# Altium PCB Pillpal.PcbDoc
Units mm, origin at the board's own origin, x right, y up, seen from the top; angles counter-clockwise.
Board outline 47 x 62.5 mm, 2 copper layers (Top Layer, Bottom Layer); 28 components, 27 nets, 127 pads, 43 vias.
Unrouted connection lines stored in the file: 17.
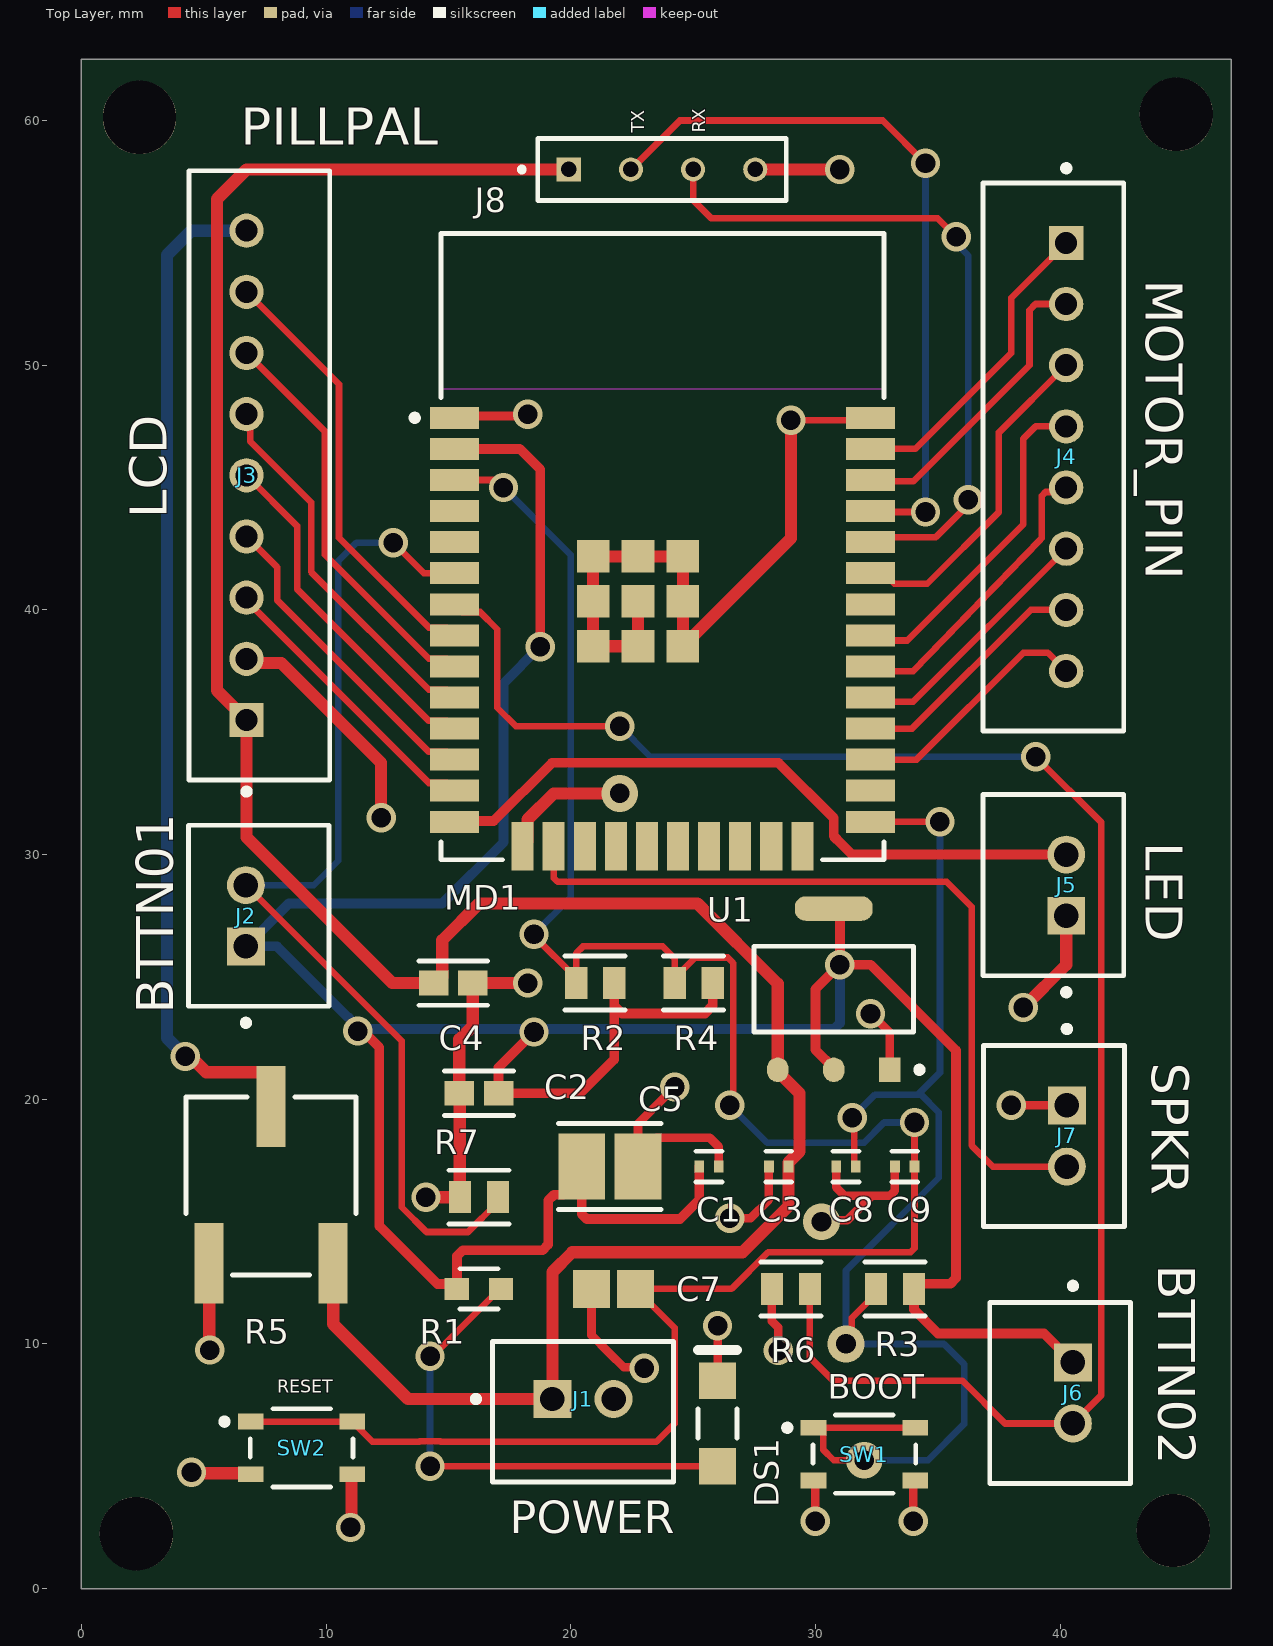
[diagram p0: Top Layer view]
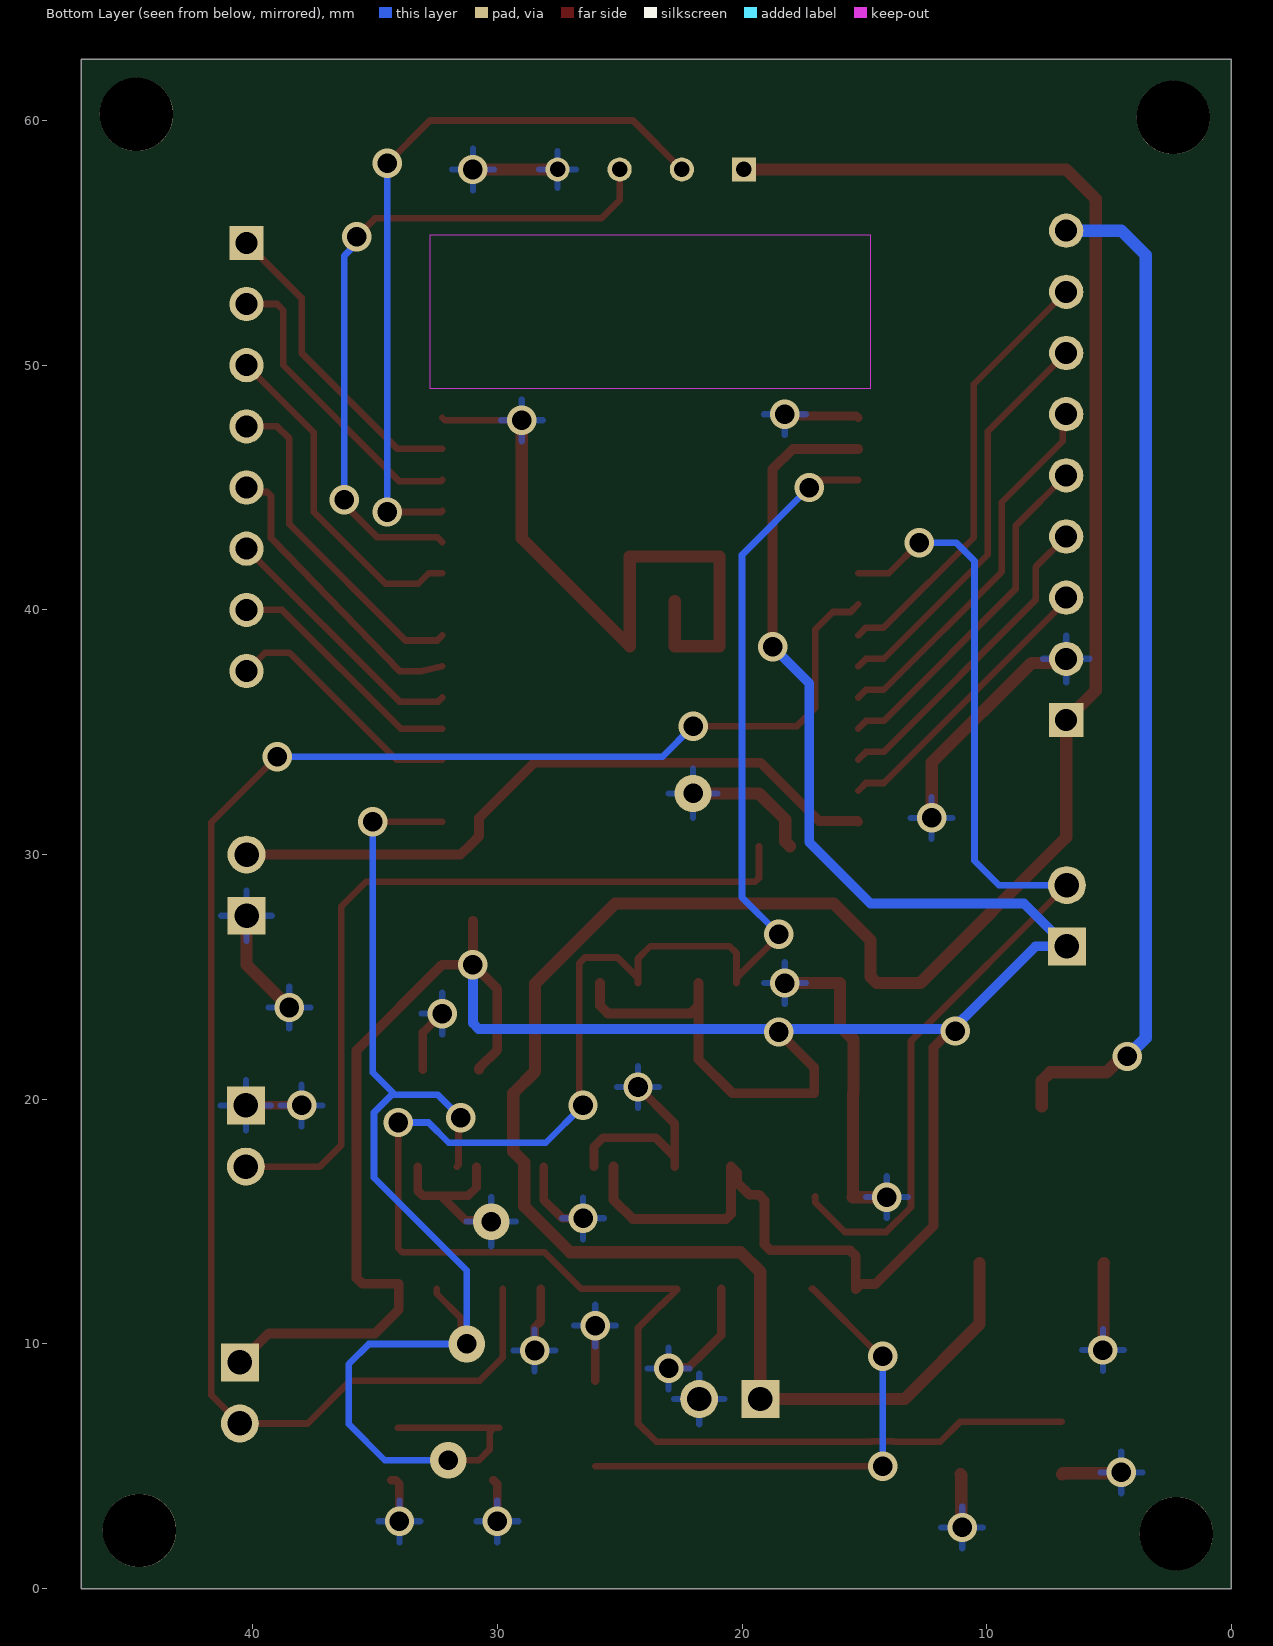
[diagram p1: Bottom Layer view, seen from below]
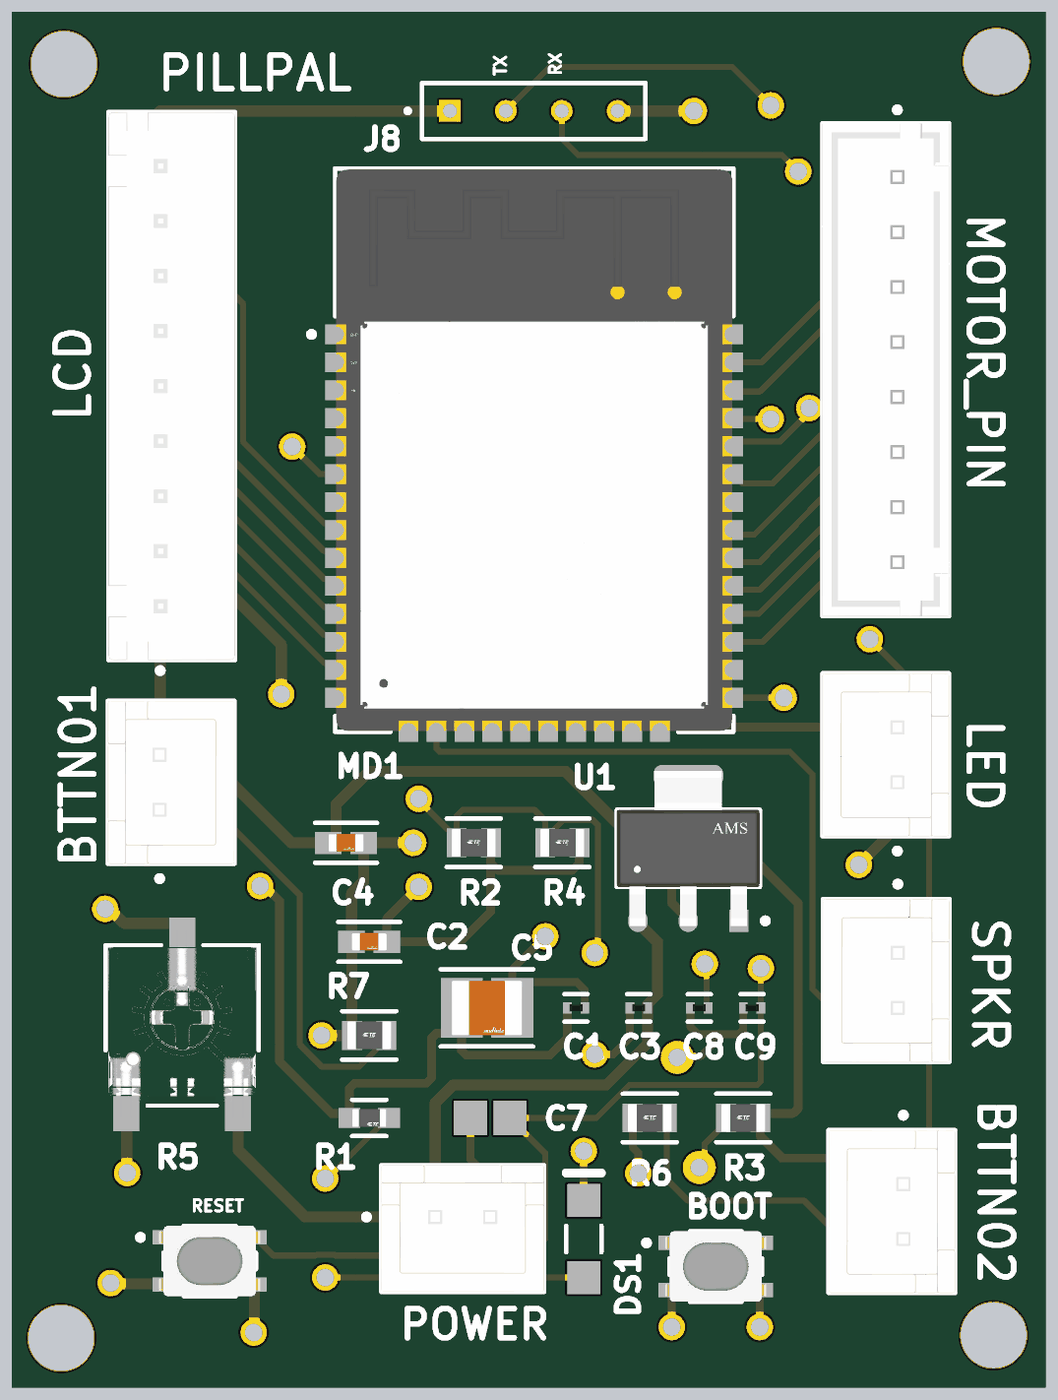
[diagram p2: 3D render of the assembled board from above, using the file's embedded part models]

## Layer stack, top to bottom
Top Solder: solder mask 0.0102, Solder Resist, Dk 3.5
Top Layer: signal copper 0.0356
Dielectric 1: dielectric 0.32, FR-4, Dk 4.8
Bottom Layer: signal copper 0.0356
Bottom Solder: solder mask 0.0102, Solder Resist, Dk 3.5

## Board outline
47,0 0,0 0,62.5 47,62.5

## Design rules (kind name [scope] priority, off if disabled: settings)
Clearance Clearance_1 [OnMid vs OnMid] p1: gap=0.254 ignorepadtopadclearanceinfootprint=FALSE except(0.3: Arc-Arc Arc-Track Track-Track) sourcerule=37 cellrowname=All cellrowtype=0 cellcolname=All cellcoltype=0 innerlayers=TRUE
Clearance Clearance_2 [(ExistsOnLayer('Top Layer') Or ExistsOnLayer('Bottom Layer')) vs (ExistsOnLayer('Top Layer') Or ExistsOnLayer('Bottom Layer'))] p2: gap=0.254 ignorepadtopadclearanceinfootprint=FALSE except(0.3: Arc-Arc Arc-Track Track-Track) sourcerule=37 cellrowname=All cellrowtype=0 cellcolname=All cellcoltype=0 outerlayers=TRUE
Clearance [All] p3: gap=0.254 ignorepadtopadclearanceinfootprint=FALSE except(0.3: Arc-Arc Arc-Track Track-Track) ismatrix=TRUE
HoleSize MaxMinHoleSize_1 [All] p1: absolutevalues=TRUE maxlimit=4 minlimit=0.025 maxpercent=80.000 minpercent=20.000
PolygonConnect [All] p1: connectstyle=Relief reliefconductorwidth=0.254 reliefentries=4 polygonreliefangle="90 Angle" airgapwidth=0.254
RoutingPriority [InNet('GND')] p1: routingpriority=0
RoutingTopology [All] p1: topology=Daisy_Balanced
RoutingVias RoutingViaStyle_1 [All] p1: holewidth=0.85 width=1.2 viastyle="Through Hole" minholewidth=0.7 minwidth=1.5 maxholewidth=0.8 maxwidth=1
RoutingVias [All] p2: holewidth=0.711 width=1.27 viastyle="Through Hole" minholewidth=0.711 minwidth=1.27 maxholewidth=0.711 maxwidth=1.27
ShortCircuit [All] p1 off: allowed=FALSE
SolderMaskExpansion [All] p1: expansion=0.102 istentingtop=FALSE
UnRoutedNet [All] p1: checkbadconnections=TRUE
Width [All] p1: maxlimit=0.7 minlimit=0.27 preferedwidth=0.6 toplayer_maxwidth=0.5 toplayer_prefwidth=0.35 minimp=50.000000 maximp=50.000000 favimp=50.000000
25 further rules are at their usual default settings.

## Components (designator, comment, footprint, x,y, rotation, side; value= is the part's Value field where it differs from the comment)
C1 "0.1uF" FP-GRM15-MFG 25.65,17.25 r0 top value=0.10μF
C2 "10uF" FP-GRM188-0_1-e0_2_0_55-IPC_A 16.25,20.25 r0 top
C3 "0.1uF" FP-GRM15-MFG 28.5,17.25 r0 top value=0.10μF
C4 "10uF" FP-GRM188-0_1-e0_2_0_55-IPC_A 15.198,24.75 r0 top
C5 "22uf" FP-GRM32E-0_3-0_2-IPC_B 21.599,17.25 r0 top
C7 "1uF" CAPC2013X145X50ML20T25 21.75,12.25 r0 top
C8 "0.1uF" FP-GRM15-MFG 31.25,17.25 r0 top value=0.10μF
C9 "0.1uF" FP-GRM15-MFG 33.65,17.25 r0 top value=0.10μF
DS1 "PWR_LED" AVAG-HSMX-C150_V 26,6.75 r90 top
J1 "B2B-XH-A(LF)(SN)" FP-B2B-XH-A_LF_SN-MFG#1 20.5,7.225 r0 top
J2 "B2B-XH-A(LF)(SN)" FP-B2B-XH-A_LF_SN-MFG#1 7.25,27.5 r90 top
J3 "B9B-XH-A(LF)(SN)" FP-B9B-XH-A_LF_SN-MFG 7.275,45.5 r270 top
J4 "B8B-XH-A(LF)(SN)" FP-B8B-XH-A_LF_SN-MFG 39.725,46.25 r90 top
J5 "B2B-XH-A(LF)(SN)" FP-B2B-XH-A_LF_SN-MFG#2 39.725,28.75 r90 top
J6 "B2B-XH-A(LF)(SN)" FP-B2B-XH-A_LF_SN-MFG#1 40,8 r270 top
J7 "B2B-XH-A(LF)(SN)" FP-B2B-XH-A_LF_SN-MFG#1 39.75,18.5 r270 top
J8 "TS-104-T-A" SAMTEC_TS-104-T-A 23.73,58 r0 top
MD1 "ESP32-WROOM-32" FP-ESP32-WROOM-32-MFG 23.75,42.59 r0 top
R1 "75" FP-RN731J-MFG 16.25,12.25 r0 top value=750Ω
R2 "10k" FP-CRG0805-IPC_C 21,24.75 r0 top
R3 "10k" FP-CRG0805-IPC_C 33.25,12.25 r0 top
R4 "10k" FP-CRG0805-IPC_C 25.026,24.75 r0 top
R5 "3361P-1-103GLF" FP-3361P-MFG 7.75,16.5 r0 top
R6 "10k" FP-CRG0805-IPC_C 29,12.25 r0 top
R7 "10k" FP-CRG0805-IPC_C 16.25,16 r0 top
SW1 "PTS810SJM250SMTRLFS" FP-PTS810SJM250SMTRLFS-MFG 32,5.5 r0 top
SW2 "PTS810SJM250SMTRLFS" FP-PTS810SJM250SMTRLFS-MFG 9,5.75 r0 top
U1 "AMS1117-3.3" FP-AMS1117-IPC_C 30.75,24.5 r90 top

## Footprints (in the part's own frame and the unit in brackets; to place one, negate y for a bottom-side part, rotate by r counter-clockwise, add the part's x,y. Pads: shape width x height; smd on the part's side, far side on the other; paste and mask are expansions set on the pad)
AVAG-HSMX-C150_V [mm] "SMD, 2-Leads, Body 3.2x1.6mm"
  rect 1.5x1.5 smd: 1(-1.75,0) 2(1.75,0)
  silkscreen extent -0.6,-0.8 3,0.8, body extent -1.6,-0.8 1.6,0.8, height 1.1
CAPC2013X145X50ML20T25 [mm] "Chip Capacitor, 2-Leads, Body 2.00x1.25mm, IPC Low Density"
  rect 1.5x1.55 smd: 1(-0.9,0) 2(0.9,0)
  body extent -1.1,-0.72 1.1,0.72, height 1.45
FP-3361P-MFG [mm]
  rect 1.19x3.3 smd paste+0 mask+0: 1(-2.54,-3.2) 2(0,3.2) 3(2.54,-3.2)
  silkscreen extent -3.48,-3.69 3.48,3.6, body extent -3.58,-4.95 3.58,4.95, height 0.25
FP-AMS1117-IPC_C [mm]
  rect 1.004x0.872 smd paste+0 mask+0: 1(-3.295,-2.29)
  rrect100% 1.004x0.872 smd paste+0 mask+0: 2(-3.295,0) 3(-3.295,2.29)
  rrect87% 1.004x3.182 smd paste+0 mask+0: 4(3.295,0)
  silkscreen extent -3.42,-3.63 1.75,3.25, body extent -3.53,-3.25 3.53,3.25, height 1.8
FP-B2B-XH-A_LF_SN-MFG#1 [mm]
  rect 1.55x1.55 hole 1 paste-2539.97 mask+0: 1(-1.25,0.525)
  round 1.55 hole 1 paste-2539.97 mask+0: 2(1.25,0.525)
  silkscreen extent -4.5,-2.88 3.7,2.87, body extent -3.8,-2.98 3.8,2.98, height 0.25
FP-B2B-XH-A_LF_SN-MFG#2 [mm]
  rect 1.55x1.55 hole 1 paste-2539.97 mask+0: 1(-1.25,-0.525)
  round 1.55 hole 1 paste-2539.97 mask+0: 2(1.25,-0.525)
  silkscreen extent -4.5,-2.88 3.7,2.87, body extent -3.7,-2.88 3.7,2.88, height 7
FP-B8B-XH-A_LF_SN-MFG [mm]
  rect 1.4x1.4 hole 0.9 paste-2539.97 mask+0: 1(8.75,-0.525)
  round 1.4 hole 0.9 paste-2539.97 mask+0: 2(6.25,-0.525) 3(3.75,-0.525) 4(1.25,-0.525) 5(-1.25,-0.525) 6(-3.75,-0.525) 7(-6.25,-0.525) 8(-8.75,-0.525)
  silkscreen extent -11.2,-2.88 11.92,2.87, body extent -11.3,-2.98 11.3,2.98, height 0.25
FP-B9B-XH-A_LF_SN-MFG [mm]
  rect 1.4x1.4 hole 0.9 paste-2539.97 mask+0: 1(10,-0.525)
  round 1.4 hole 0.9 paste-2539.97 mask+0: 2(7.5,-0.525) 3(5,-0.525) 4(2.5,-0.525) 5(0,-0.525) 6(-2.5,-0.525) 7(-5,-0.525) 8(-7.5,-0.525) 9(-10,-0.525)
  silkscreen extent -12.45,-2.87 13.05,2.88, body extent -12.55,-2.98 12.55,2.98, height 0.25
FP-CRG0805-IPC_C [mm]
  rect 0.906x1.307 smd paste+0 mask+0: 1(-0.776,0) 2(0.776,0)
  silkscreen extent -1.23,-1.1 1.23,1.1, body extent -1.33,-0.8 1.33,0.8, height 0.25
FP-ESP32-WROOM-32-MFG [mm]
  rect 2x0.9 smd paste+0 mask+0: 1(-8.5,5.26) 2(-8.5,3.99) 3(-8.5,2.72) 4(-8.5,1.45) 5(-8.5,0.18) 6(-8.5,-1.09) 7(-8.5,-2.36) 8(-8.5,-3.63) 9(-8.5,-4.9) 10(-8.5,-6.17) 11(-8.5,-7.44) 12(-8.5,-8.71) 13(-8.5,-9.98) 14(-8.5,-11.25) 25(8.5,-11.25) 26(8.5,-9.98) 27(8.5,-8.71) 28(8.5,-7.44) 29(8.5,-6.17) 30(8.5,-4.9) 31(8.5,-3.63) 32(8.5,-2.36) 33(8.5,-1.09) 34(8.5,0.18) 35(8.5,1.45) 36(8.5,2.72) 37(8.5,3.99) 38(8.5,5.26)
  rect 0.9x2 smd paste+0 mask+0: 15(-5.715,-12.25) 16(-4.445,-12.25) 17(-3.175,-12.25) 18(-1.905,-12.25) 19(-0.635,-12.25) 20(0.635,-12.25) 21(1.905,-12.25) 22(3.175,-12.25) 23(4.445,-12.25) 24(5.715,-12.25)
  rect 1.33x1.33 smd paste+0 mask+0: 39(-2.835,-4.075) 39(-2.835,-2.24) 39(-2.835,-0.405) 39(-1,-4.075) 39(-1,-2.24) 39(-1,-0.405) 39(0.835,-4.075) 39(0.835,-2.24) 39(0.835,-0.405)
  Keep-Out Layer region: -9,6.45 9,6.45 9,12.75 -9,12.75
  Keep-Out Layer region: -9,6.45 9,6.45 9,12.75 -9,12.75
  silkscreen extent -10.25,-12.8 9.05,12.8, body extent -9.6,-13.35 9.6,12.9, height 0.25
FP-GRM15-MFG [mm]
  rect 0.4x0.5 smd paste+0 mask+0: 1(-0.4,0) 2(0.4,0)
  silkscreen extent -0.52,-0.63 0.53,0.62, body extent -0.7,-0.38 0.7,0.38, height 0.25
FP-GRM32E-0_3-0_2-IPC_B [mm]
  rect 1.903x2.706 smd paste+0 mask+0: 1(-1.151,0) 2(1.151,0)
  silkscreen extent -2.1,-1.75 2.1,1.75, body extent -2.35,-1.6 2.35,1.6, height 0.25
FP-GRM188-0_1-e0_2_0_55-IPC_A [mm]
  rect 1.208x1.012 smd paste+0 mask+0: 1(-0.802,0) 2(0.802,0)
  silkscreen extent -1.41,-0.91 1.41,0.91, body extent -1.91,-1.01 1.91,1.01, height 0.25
FP-PTS810SJM250SMTRLFS-MFG [mm]
  rect 1.05x0.65 smd paste+0 mask+0: 1(-2.075,1.075) 2(2.075,1.075) 3(-2.075,-1.075) 4(2.075,-1.075)
  silkscreen extent -3.27,-1.6 2.1,1.6, body extent -2.7,-1.7 2.7,1.7, height 0.25
FP-RN731J-MFG [mm]
  rect 1x0.9 smd paste+0 mask+0: 1(-0.9,0) 2(0.9,0)
  silkscreen extent -0.77,-0.83 0.78,0.82, body extent -1.5,-0.55 1.5,0.55, height 0.25
SAMTEC_TS-104-T-A [mm]
  rect 0.985x0.985 hole 0.635: 01(-3.81,0)
  round 0.985 hole 0.635: 02(-1.27,0) 03(1.27,0) 04(3.81,0)
  silkscreen extent -5.83,-1.27 5.08,1.27

## Part data
C1 C3 C8 C9: library part CMP-2100-03641-2, "CAP CER 0.1UF 16V X7R 0402", Capacitance=0.10μF, Manufacturer=Murata, Manufacturer Part Number=GRM155R71C104KA88D, Package=GRM15, Temperature="-55°C to +125°C", Temperature Characteristic=X7R, Temperature Range High=+125°C, Temperature Range Low=-55°C, Tolerance=10%, Voltage Rating=16Vdc, Category=Cap, ComponentLink2Description=Datasheet, ComponentLink2URL=https://search.murata.co.jp/Ceramy/image/img/A01X/G101/ENG/GRM155R71H471KA01-01A.pdf, Device Class L1="Passive Components", Device Class L2=Capacitors, Device Class L3="Ceramic Capacitors", Digikey Description="CAP CER 0.1UF 16V X7R 0402", Height=0.55mm, Ipc Land Pattern Name=CAPC10050X219, Lead Free=yes, Material=Ceramic, Mouser Description="0402 0.1 uF 16V ±10 % Tolerance X7R SMT Multilayer Ceramic Capacitor", Octopart=https://octopart.com/grm155r71c104ka88d-murata-196880, RoHS=TRUE, Standoff Height=0mm
C2 C4: library part CMP-2006-02792-2, "Chip Multilayer Ceramic Capacitors for General Purpose, 0603, 10uF, X5R, 15%, 20%, 6.3V", Case Code (Imperial)=0603, Case Code (Metric)=1608, Dielectric=X5R, Max Operating Temperature=85°C, Min Operating Temperature=-55°C, Package Quantity=4000, Tolerance=20%, Voltage=6.3V, Capacitance=10uF, Case/Package=0603, Depth=0.8mm, Height=0.8mm, Lead Free="Lead Free", Length=1.6mm, Material=Ceramic, Mount="Surface Mount", Packaging="Tape and Reel", Radiation Hardening=No, REACH SVHC="No SVHC", Termination=SMD/SMT, Thickness=0.035inch, Voltage Rating=6.3V, Voltage Rating (DC)=6.3V, Width=0.031inch
C5: library part CMP-06035-011048-1, "Chip Multilayer Ceramic Capacitors for General Purpose, 1210, 22uF, X7R, 15%, 10%, 16V", Capacitance=22uF, Case Code (Imperial)=1210, Case Code (Metric)=3225, Dielectric=X7R, Max Operating Temperature=125°C, Min Operating Temperature=-55°C, Package Quantity=1, Resistor Type=Ceramic, Tolerance=10%, Voltage=16V, Case/Package=1210, Depth=1.6mm, Height=2.5mm, Lead Free="Lead Free", Length=3.2mm, Material=Ceramic, Mount="Surface Mount", Packaging="Tape and Reel", Radiation Hardening=No, REACH SVHC="No SVHC", Termination=SMD/SMT, Thickness=0.106inch, Voltage Rating=16V, Voltage Rating (DC)=16V, Weight=0.00388oz, Width=2.5mm
C7: library part CMP-1036-04731-2, Manufacturer=Kemet, Part Number=C0805C105K9PACTU
DS1: library part CMP-2000-06426-1, "LED Uni-Color Red, 65 mW, 25 mA, -40 to 85 degC, 2-Pin SMD, RoHS, Tape and Reel", Emitting Color=Red, Forward Current=25mA, Forward Voltage=2.6V, Manufacturer=Avago, Operating Temp Range=-40Cto85C, Operating Temperature Classification=Industrial, Package Description="2-Pin Surface Mount Device, Body 3.2 x 1.6 mm", Package Reference=HSMX-C150, Package Type=ChipLed, Power Dissipation=78W, Reverse Voltage=5V, Test Current (It)=20mA, Chip Material=GaAlAs, Datasheet URL=http://media.digikey.com/pdf/Data%20Sheets/Avago%20PDFs/HSMz-Czzz.pdf, Datasheet Version=03/2012, DELETED=Compliant, Dominant Wave Length=639nm, High Brightness=No, Lens Dimensions=2x1.6x0.6mm, Lens Type=ColorlessDiffused, Lum Intensity=17mcd, Luminous Intensity=17mcd, Main Category=ChipLED, Manufacturer URL=http://www.avagotech.com/, Mounting=SurfaceMount, Mounting Technology=SurfaceMount, Number of  Elements=1, Packaging=TapeandReel, Peak Wavelength=660nm, Pin Count=2, Product Depth (mm)=1.6mm, Product Height (mm)=1.1mm, Product Length (mm)=3.2mm, Rad Hardened=No, Shape Type=Rectangular, Type=Uni-Color, Viewing Angle=170deg
J1 J2 J5 J6 J7: library part CMP-2000-05888-3, "CONN HEADER VERT 2POS 2.5MM", Color=Natural, Contact Resistance=20mR, Current Rating=3A, Housing Color=White, Insulation Resistance=1GR, Max Operating Temperature=85°C, Max Voltage Rating (AC)=250V, Min Operating Temperature=-25°C, Connector Type="Male Pin", Contact Material=Brass, Contact Plating=Tin, Contact Type="Male Pin", Depth=5.75mm, Fastening Type=Detent, Housing Material=Polyamide, Lead Free="Lead Free", Lead Pitch=2.5mm, Length=7.4mm, Max Current Rating=3A, Max Voltage Rating (DC)=250V, Mount="Through Hole", Number of Contacts=2, Number of Positions=2, Number of Rows=1, Orientation=Straight, Packaging=Bulk, Pitch=2.5mm, REACH SVHC="No SVHC", Series=XH, Termination=Solder, Voltage Rating=250V, Voltage Rating (AC)=250V, Wire/Cable Gauge=22AWG
J3: library part CMP-17439-000168-1, "CONN HEADER VERT 9POS 2.5MM", Color=Natural, Contact Resistance=20mR, Current Rating=3A, Flammability Rating="UL94 V-0", Housing Color=White, Insulation Resistance=1GR, Max Operating Temperature=85°C, Max Voltage Rating (AC)=250V, Min Operating Temperature=-25°C, Package Quantity=250, Connector Type=Header, Contact Finish - Mating=TIN, Contact Material=Brass, Contact Plating=Tin, Contact Shape=Square, Contact Type="Male Pin", Depth=5.75mm, Fastening Type=Detent, Gender=Male, Housing Material=Polyamide, Insulation Color=Natural, Insulation Material=Nylon, Lead Free="Lead Free", Lead Pitch=2.5mm, Length=24.9mm, Mated Stacking Heights=9.8mm, Max Current Rating=3A, Mount="Through Hole", Number of Contacts=9, Number of Positions=9, Number of Rows=1, Orientation=Straight, Packaging=Bulk, Pitch=2.5mm, REACH SVHC="No SVHC", Series=XH, Termination=Solder, Voltage Rating=250V, Voltage Rating (AC)=250V, Wire/Cable Gauge=22AWG
J4: library part CMP-17438-000015-1, "CONN HEADER VERT 8POS 2.5MM", Color=Natural, Contact Resistance=20mR, Current Rating=3A, Housing Color=White, Insulation Resistance=1GR, Max Operating Temperature=85°C, Max Voltage Rating (AC)=250V, Min Operating Temperature=-25°C, Connector Type="Male Pin", Contact Material=Brass, Contact Plating=Tin, Contact Type="Male Pin", Depth=5.75mm, Fastening Type=Detent, Housing Material=Polyamide, Lead Free="Lead Free", Lead Pitch=2.5mm, Length=22.4mm, Max Current Rating=3A, Mount="Through Hole", Number of Contacts=8, Number of Positions=8, Number of Rows=1, Orientation=Straight, Packaging=Bulk, Pitch=2.5mm, REACH SVHC="No SVHC", Series=XH, Termination=Press-Fit, Voltage Rating=250V, Voltage Rating (AC)=250V, Wire/Cable Gauge=22AWG
J8: "TS - Samtec 2.54mm Single Row Machined Terminal Strip - Fast Stock", Package=None, Supplier Part Number 1=SAM1112-04-ND, Availability="In Stock", Check_prices=https://www.snapeda.com/parts/TS-104-T-A/Samtec+Inc./view-part/?ref=eda, MF="Samtec Inc.", MP=TS-104-T-A, Price=None, Purchase-URL=https://pricing.snapeda.com/search/part/TS-104-T-A/?ref=eda, SnapEDA_Link=https://www.snapeda.com/parts/TS-104-T-A/Samtec+Inc./view-part/?ref=snap, Supplier 1=Digikey
MD1: library part CMP-194065-000008-1, "RX TXRX MOD WIFI SURFACE MOUNT", Case/Package=SMD/SMT, Frequency=2.5GHz, Max Operating Temperature=85°C, Min Operating Temperature=-40°C, Operating Supply Voltage=3.6V, Package Quantity=550, Data Rate=150Mbps, Mount="Surface Mount", Packaging="Cut Tape", Sensitivity=-98dBm, Weight=0.088185oz
R1: library part CMP-03211-006003-1, "Thin Film Resistors RN 0603 750Ω 0.1% 10ppm/°C", Manufacturer="TE Connectivity", Manufacturer Part Number=RN73C1J750RBTG, Package=RN731J, Power Rating=0.063W, Resistance=750Ω, Temperature="-55°C to +155°C", Temperature Coefficient=10ppm/°C, Temperature Range High=+155°C, Temperature Range Low=-55°C, Tolerance=0.1%, Voltage Rating=50V, Automotive=No, Category=Res, ComponentLink2Description=Datasheet, ComponentLink2URL=https://www.te.com/commerce/DocumentDelivery/DDEController?Action=showdoc&DocId=Data+Sheet%7F1773270%7FP%7Fpdf%7FEnglish%7FENG_DS_1773270_P.pdf%7F9-1614352-9, Composition="Thin Film", Device Class L1="Passive Components", Device Class L2=Resistors, Device Class L3="Chip SMD Resistors", Height=0.55mm, Ipc Land Pattern Name=RESC15580X45, Lead Free=Yes, Octopart=https://octopart.com/rn73c1j750rbtg-te+connectivity-41131173, octopart_url=https://octopart.com/rn73c1j750rbtg-te+connectivity-41131173, Packaging="250 cut tape length", RoHS=TRUE, Series=RN73
R2 R3 R4 R6 R7: library part CMP-03211-011401-1, "RES SMD 10K OHM 1% 1/8W 0805", Case/Package=0805, Max Operating Temperature=125°C, Min Operating Temperature=-55°C, Number of Resistors=1, Power Rating=125mW, Resistance=10kR, Resistor Type="Thick Film", Temperature Coefficient=100ppm/°C, Tolerance=1%, Voltage Rating=150V, Depth=1.25mm, ELV=Compliant, Height=0.55mm, Length=2mm, Mount="Surface Mount", Number of Terminations=2, Packaging="Tape and Reel", Radiation Hardening=No, RoHS Compliant=Yes, Series="CRG Series", Technology="THICK FILM", Termination=Solder
R5: library part CMP-07234-000045-1, "TRIMMER 10K OHM 0.5W GW TOP ADJ", Color=Natural, Max Operating Temperature=125°C, Max Power Dissipation=500mW, Min Operating Temperature=-55°C, Package Quantity=1, Resistance=10kR, Resistance Tolerance=10%, Resistor Type=Cermet, Temperature Coefficient=100ppm/°C, Voltage Rating=300V, Contact Plating=Tin, Depth=8.53mm, Height=0.205inch, Lead Free="Lead Free", Length=6.71mm, Military Standard=Not, Mount="Surface Mount", Number of Turns=1, Packaging="Tape and Reel", Power Rating=500mW, Radiation Hardening=No, REACH SVHC="No SVHC", RoHS Compliant=Yes, Series="Trimpot® 3361 - Sealed", Taper=Linear, Technology=CERMET, Termination="Gull Wing", Tolerance=10%, Voltage Rating (DC)=300V, Weight=0.567g, Width=0.264inch
SW1 SW2: library part CMP-10040-000001-2, "SWITCH TACTILE SPST-NO 0.05A 16V", Case/Package=SMD/SMT, Color=Black, Current Rating=50mA, Max Operating Temperature=85°C, Min Operating Temperature=-40°C, Operating Force=160gf, Package Quantity=2900, Voltage Rating (DC)=16V, Actuator Type=Standard, Contact Plating=Silver, Depth=4.6mm, Illumination Type=Non-Illuminated, Lead Free="Lead Free", Length=3.2mm, Max Current Rating=50mA, Mechanical Life=150000Cycles, Mount="Surface Mount", Orientation=Straight, Packaging="Tape and Reel", RoHS Compliant=Yes, Switch Function=Off-Mom, Switch Travel=0.15mm, Termination=J-Bend, Throw Configuration=SPST
U1: library part CMP-209535-000001-1, "LDO Voltage Regulators 1A, 3.3V", Dropout Voltage=1.1V, Manufacturer="Advanced Monolithic Systems", Max Junction Temp=+125°C, Max Power Dissipation=1.2W, Max Supply Voltage=15V, Nominal Supply Current=5mA, Output Current=1A, Output Voltage=3.3V, Package=AMS1117, Temperature="-40°C to +125°C", Temperature Range Low=-40°C, Automotive=No, Category=IC, ComponentLink2Description=Datasheet, ComponentLink2URL=http://www.advanced-monolithic.com/pdf/ds1117.pdf, Device Class L1="Integrated Circuits (ICs)", Device Class L2="Power Management ICs", Device Class L3="Voltage Regulators - Linear", Height=1.8mm, Ipc Land Pattern Name=SOT229P700X180-4, Lead Free=Yes, Manufacturer Part Number=AMS1117-3.3, Number Of Outputs=1, Octopart=https://octopart.com/ams1117-3.3-advanced+monolithic+systems-25899300, Output Type=Fixed, RoHS=TRUE, Standoff Height=0.64mm, Temperature Range High=+125°C

## Free pads (board coordinates)
  round 3 hole 3: 1(44.75,60.25) 2(2.377,60.127) 3(2.25,2.25) 4(44.627,2.377)

## Via types
v1: diameter 1.2, hole 0.8, Top Layer to Bottom Layer, 39 vias
v2: diameter 1.5, hole 0.8, Top Layer to Bottom Layer, 4 vias

## Nets (pads, with @x,y where several pads share a name; then routed paths per layer and width w, separated by ;. In a path a pad name is that pad's centre, name@x,y a point inside that pad or via, vN(x,y) a via of type N, cw(c..) or ccw(c..) an arc to the next point about the centre after c; other vN are vias at no path point)
+5: C3.2 C4.1 J1.1 J3.1 J8.01 R5.3 U1.3 | length 107.5
  Top Layer w0.5: R5.3 10.29,10.81 13.35,7.75 J1.1 19.25,12.939 20.061,13.75 27.023,13.75 28.9,15.627 C3.2 28.9,17.417 29.349,17.866 29.349,20.25 28.46,21.139 U1.3 28.46,24.718 25.178,28 16.25,28 14.75,26.5 14.75,25.006 14.494,24.75 12.708,24.75 6.75,30.708 J3.1 5.546,36.704 5.546,56.796 6.75,58 J8.01
CHIP_PU: C7.2 C9.2 MD1.3 R2.1 R4.1 SW2.1 SW2.2 | length 89.9
  Top Layer w0.27: SW2.1 SW2.2 11.9,6 13.802,6 13.826,6.024 14.674,6.024 14.698,6 23.5,6 24.25,6.75 24.25,10.65 23.29,11.61 23.265,11.61 22.65,12.225 C7.2 26.567,12.25 28.067,13.75 33.892,13.75 34.05,13.908 C9.2 v1(34.05,19.05) ; MD1.3 16.94,45.31 v1(17.25,45) ; v1(18.5,26.75) 18.5,26.674 R2.1@20.224,24.95 ; R2.1 R2.1@20.224,24.95 ; R4.1 R4.1@24.25,24.95 ; v1(26.5,19.75) 26.644,19.894 26.644,25.565 26.416,25.792 25.092,25.792 R4.1@24.25,24.95 ; R2.1@20.224,24.95 20.224,25.974 20.5,26.25 23.75,26.25 24.25,25.75 R4.1@24.25,24.95
  Bottom Layer w0.27: v1(17.25,45) 20,42.25 20,28.25 v1(18.5,26.75) ; v1(26.5,19.75) 28.024,18.226 31.984,18.226 32.809,19.05 v1(34.05,19.05)
GND: C1.2 C2.1 C3.1 C4.2 C5.2 C7.1 C8.1 C9.1 DS1.2 J1.2 J3.2 J5.1 J7.1 J8.04 MD1.1 MD1.15 MD1.38 MD1.39 R5.1 R6.1 R7.1 SW1.3 SW1.4 SW2.3 SW2.4 U1.1 | length 113
  Top Layer w0.27: v1(29,47.75) 32.15,47.75 MD1.38
  Top Layer w0.35: MD1.1 15.325,47.925 18.175,47.925 v1(18.25,48) ; C7.1 20.85,10.363 21.59,9.623 22.161,9.052 22.948,9.052 v1(23,9) ; C5.2 C5.2@22.75,17.652 ; v1(24.25,20.5) 22.75,19 C5.2@22.75,17.652 ; DS1.2 v1(26,10.75) ; C1.2 26.05,18.056 25.678,18.428 23.526,18.428 C5.2@22.75,17.652 ; v1(26.496,15.136) 27.348,15.136 28.1,15.888 C3.1 ; R6.1 28.224,10.929 28.477,10.676 v1(28.477,9.732) ; v1(30,2.75) SW1.3@30,4.275 ; SW1.3@30.175,4.425 SW1.3@30.15,4.425 ; v2(30.25,15) 30.302,15.052 31.302,15.052 32.306,16.056 ; C8.1 30.85,16.4 31.194,16.056 32.306,16.056 ; v1(32.25,23.5) 32.27,23.5 33.04,22.73 U1.1 ; C9.1 33.25,16.261 33.045,16.056 32.306,16.056 ; v1(34,2.75) SW1.4@34,4.275 ; SW1.4@34.325,4.425 SW1.4@34.15,4.425 ; v1(38,19.75) J7.1 ; SW1.3@30,4.275 SW1.3@30.15,4.425 ; SW1.3@30,4.275 SW1.3@30.15,4.425 ; SW1.4@34,4.275 SW1.4@34.105,4.38 ; SW1.4@34,4.275 SW1.4@34.105,4.38 ; SW1.4@34.105,4.38 SW1.4@34.15,4.425 ; SW1.4@34.105,4.38 34.113,4.388 SW1.4@34.15,4.425
  Top Layer w0.5: v1(4.5,4.75) 4.537,4.713 6.888,4.713 SW2.3 ; R5.1 5.23,13.28 5.23,9.77 v1(5.25,9.75) ; J3.2 6.922,37.828 8.172,37.828 12.25,33.75 v1(12.25,31.5) ; v1(11,2.5) 11.038,2.538 11.038,4.638 SW2.4 ; v1(14.083,16) R7.1 15.461,16.013 15.461,20.237 C2.1 15.448,22.448 16,23 C4.2 v1(18.25,24.75) ; MD1.15 18.235,30.54 18.235,31.433 19.302,32.5 v2(22,32.5) ; MD1.39@22.75,40.35 22.75,38.515 20.915,38.515 20.915,40.35 20.915,42.185 22.75,42.185 24.585,42.185 24.585,40.35 24.585,38.515 29,42.93 v1(29,47.75) ; J8.04 v1(31,58) ; v1(38.5,23.75) 40.25,25.5 J5.1
GPIO: C8.2 MD1.25 R3.1 SW1.1 SW1.2 | length 53.9
  Top Layer w0.27: v2(31.25,10) 31.485,10.235 31.485,11.061 32.474,12.049 R3.1 ; v1(31.5,19.25) 31.585,19.165 31.585,17.315 C8.2 ; v2(32,5.25) 30.75,5.25 30.315,5.685 30.315,6.385 30.125,6.575 SW1.1 33.325,6.575 SW1.2 ; MD1.25 v1(35.09,31.34)
  Bottom Layer w0.27: v1(31.5,19.25) 32.439,20.189 34.189,20.189 ; v2(32,5.25) 34.6,5.25 36.075,6.725 36.075,9.175 35.25,10 v2(31.25,10) 31.25,13.002 35.039,16.791 35.039,19.46 34.31,20.189 34.189,20.189 ; v1(35.09,31.34) 35.09,21.09 34.189,20.189
IO5: J4.6 MD1.29 | length 10.7
  Top Layer w0.27: MD1.29 32.42,36.25 34,36.25 J4.6
IO12: J5.2 MD1.14 | length 28
  Top Layer w0.4: MD1.14 15.28,31.37 16.85,31.37 19.23,33.75 28.5,33.75 30.75,31.5 30.75,30.748 31.062,30.436 31.064,30.436 31.5,30 J5.2
IO13: J7.2 MD1.16 | length 32.9
  Top Layer w0.27: MD1.16 19.305,29.044 19.463,28.886 35.364,28.886 36.385,27.865 36.385,18.115 37.25,17.25 J7.2
IO14: J3.3 MD1.13 | length 11.8
  Top Layer w0.27: J3.3 6.75,40.38 14.205,32.925 14.935,32.925 MD1.13
IO16: J4.8 MD1.27 | length 10.1
  Top Layer w0.27: MD1.27 34.13,33.88 38.5,38.25 39.5,38.25 J4.8
IO17: J4.7 MD1.28 | length 10
  Top Layer w0.27: MD1.28 33.947,35.15 38.797,40 J4.7
IO18: J4.5 MD1.30 | length 12.2
  Top Layer w0.27: MD1.30 33.115,37.5 34,37.5 39.174,42.853 39.25,42.931 39.25,44.661 39.408,44.819 40.069,44.819 J4.5
IO19: J4.4 MD1.31 | length 13.8
  Top Layer w0.27: MD1.31 32.46,38.75 33.75,38.75 38.5,43.5 38.5,47 39,47.5 J4.4
IO21: J4.3 MD1.33 | length 13.8
  Top Layer w0.27: MD1.33 32.8,41.5 33.231,41.069 34.569,41.069 37.5,44 37.5,47.25 J4.3
IO22: J4.2 MD1.36 | length 12.3
  Top Layer w0.27: MD1.36 32.31,45.25 34,45.25 38.75,50 38.75,52.25 39,52.5 J4.2
IO23: J4.1 MD1.37 | length 12.8
  Top Layer w0.27: MD1.37 34.08,46.58 38,50.5 38,52.75 J4.1
IO25: J3.6 MD1.10 | length 15.5
  Top Layer w0.27: J3.6 6.895,47.855 6.895,46.895 9.388,44.403 9.388,41.552 14.205,36.735 14.935,36.735 MD1.10
IO26: J3.5 MD1.11 | length 14.3
  Top Layer w0.27: J3.5 8.818,43.432 8.818,40.852 14.205,35.465 14.935,35.465 MD1.11
IO27: J3.4 MD1.12 | length 13.1
  Top Layer w0.27: J3.4 8,41.75 8,40.4 14.205,34.195 14.935,34.195 MD1.12
IO32: J3.8 MD1.8 | length 18
  Top Layer w0.27: J3.8 10.528,49.222 10.528,42.952 14.205,39.275 14.935,39.275 MD1.8
IO33: J3.7 MD1.9 | length 16.8
  Top Layer w0.27: J3.7 9.958,47.292 9.958,42.252 14.205,38.005 14.935,38.005 MD1.9
IO34: J2.2 MD1.6 R7.2 | length 42.9
  Top Layer w0.27: J2.2 13.094,22.381 13.094,15.59 14.11,14.574 15.801,14.574 17,15.773 17,15.974 R7.2 R7.2@17,16.026 ; v1(12.75,42.75) 14,41.5 MD1.6
  Bottom Layer w0.27: J2.2 9.5,28.75 10.5,29.75 10.5,42 11.25,42.75 v1(12.75,42.75)
IO35: J6.2 MD1.7 R6.2 | length 71.7
  Top Layer w0.27: MD1.7 15.565,39.915 16.295,39.915 17,39.21 17,36 17.75,35.25 v1(22,35.25) ; R6.2 29.776,9.446 30.722,8.5 36,8.5 37.75,6.75 J6.2 41.689,7.914 41.689,31.311 v1(39,34)
  Bottom Layer w0.27: v1(22,35.25) 23.25,34 v1(39,34)
NetDS1_1: DS1.1 R1.2 | length 20.3
  Top Layer w0.27: v1(14.25,5) DS1.1 ; v1(14.25,9.5) 14.35,9.5 17.1,12.25 R1.2
  Bottom Layer w0.27: v1(14.25,5) v1(14.25,9.5)
NetJ3_9: J3.9 R5.2 | length 41.7
  Top Layer w0.5: v1(4.25,21.75) 4.458,21.75 5.108,21.1 7.405,21.1 7.75,20.755 R5.2
  Bottom Layer w0.5: v1(4.25,21.75) 3.5,22.5 3.5,54.5 4.5,55.5 J3.9
RX: J8.03 MD1.34 | length 28.4
  Top Layer w0.27: J8.03 25,56.75 25.75,56 35,56 v1(35.75,55.25) ; MD1.34 32.456,42.976 34.924,42.976 36.25,44.302 v1(36.25,44.5)
  Bottom Layer w0.27: v1(35.75,55.25) 35.75,54.979 36.25,54.479 v1(36.25,44.5)
TX: J8.02 MD1.35 | length 30.1
  Top Layer w0.27: J8.02 24.46,60 32.75,60 v1(34.5,58.25) ; MD1.35 32.29,44 v1(34.5,44)
  Bottom Layer w0.27: v1(34.5,44) v1(34.5,58.25)
VCC_3V3: C1.1 C2.2 C5.1 J2.1 J6.1 MD1.2 R1.1 R2.2 R3.2 R4.2 U1.2 U1.4 | length 140.2
  Top Layer w0.4: v1(11.288,22.788) 11.505,22.788 12.176,22.117 12.176,14.824 14.551,12.449 15.151,12.449 R1.1 15.35,12.449 15.35,13.593 15.584,13.827 18.843,13.827 19.077,14.062 19.077,15.863 19.312,16.097 19.697,16.097 20.199,16.598 20.199,17 C5.1 ; MD1.2 17.92,46.58 18.75,45.75 v1(18.75,38.5) ; v1(18.5,22.75) 17.052,21.302 C2.2 20.4,20.25 21.776,21.626 21.776,23.827 ; C5.1@20.449,17.236 20.449,15.308 20.654,15.103 24.463,15.103 25.25,15.89 C1.1 ; R2.2 21.776,23.827 ; R4.2 25.802,23.827 25.485,23.51 22.094,23.51 21.776,23.827 ; U1.2 30.75,21.271 30,22.021 30,24.5 v1(31,25.5) ; U1.4@31,27.295 v1(31,25.5) ; J6.1 39.346,10.429 35.005,10.429 34.026,11.408 R3.2 34.026,12.461 35.516,12.461 35.75,12.695 35.75,22 32.25,25.5 v1(31,25.5)
  Bottom Layer w0.4: v1(11.288,22.788) v1@11.288,23 ; v1(18.75,38.5) 17.25,37 17.25,30.5 14.75,28 8.475,28 J2.1 8,26.25 10.902,23.348 10.916,23.348 11.265,23 11.5,23 11.625,22.875 18.375,22.875 v1(18.5,22.75) 18.625,22.875 30.766,22.875 31,23.109 v1(31,25.5)
pads on no net: MD1.4 MD1.5 MD1.17 MD1.18 MD1.19 MD1.20 MD1.21 MD1.22 MD1.23 MD1.24 MD1.26 MD1.32

## Polygon pours and split planes (outlines as drawn)
GND on Bottom Layer "GND_L02_P000" (none, pour order 0): 0.25,62.25 0.25,0.25 46.75,0.25 46.75,62.25

## Silkscreen, mask and mechanical layers (free items; w line width, h text height)
Top Overlay:
  text "TX" at 23,59.5 h0.52 r90
  text "RX" at 25.5,59.5 h0.52 r90
  text "PILLPAL" at 6.504,59.004 h1.52
  text "MOTOR_PIN" at 43.508,53.496 h1.52 r270
  text "LCD" at 3.496,43.754 h1.52 r90
  text "LED" at 43.504,30.496 h1.52 r270
  text "BTTN01" at 3.746,23.504 h1.52 r90
  text "SPKR" at 43.754,21.496 h1.52 r270
  text "BTTN02" at 44.004,13.246 h1.52 r270
  text "RESET" at 8.004,8.004 h0.52
  text "BOOT" at 30.504,7.754 h1
  text "POWER" at 17.504,2.254 h1.32